# Altium PCB PCBoki.PcbDoc
Units mil, origin at the board's own origin, x right, y up, seen from the top; angles counter-clockwise.
Board outline 2430 x 3770 mil, 2 copper layers (Top Layer, Bottom Layer); 31 components, 31 nets, 145 pads, 13 vias.
Unrouted connection lines stored in the file: 5.
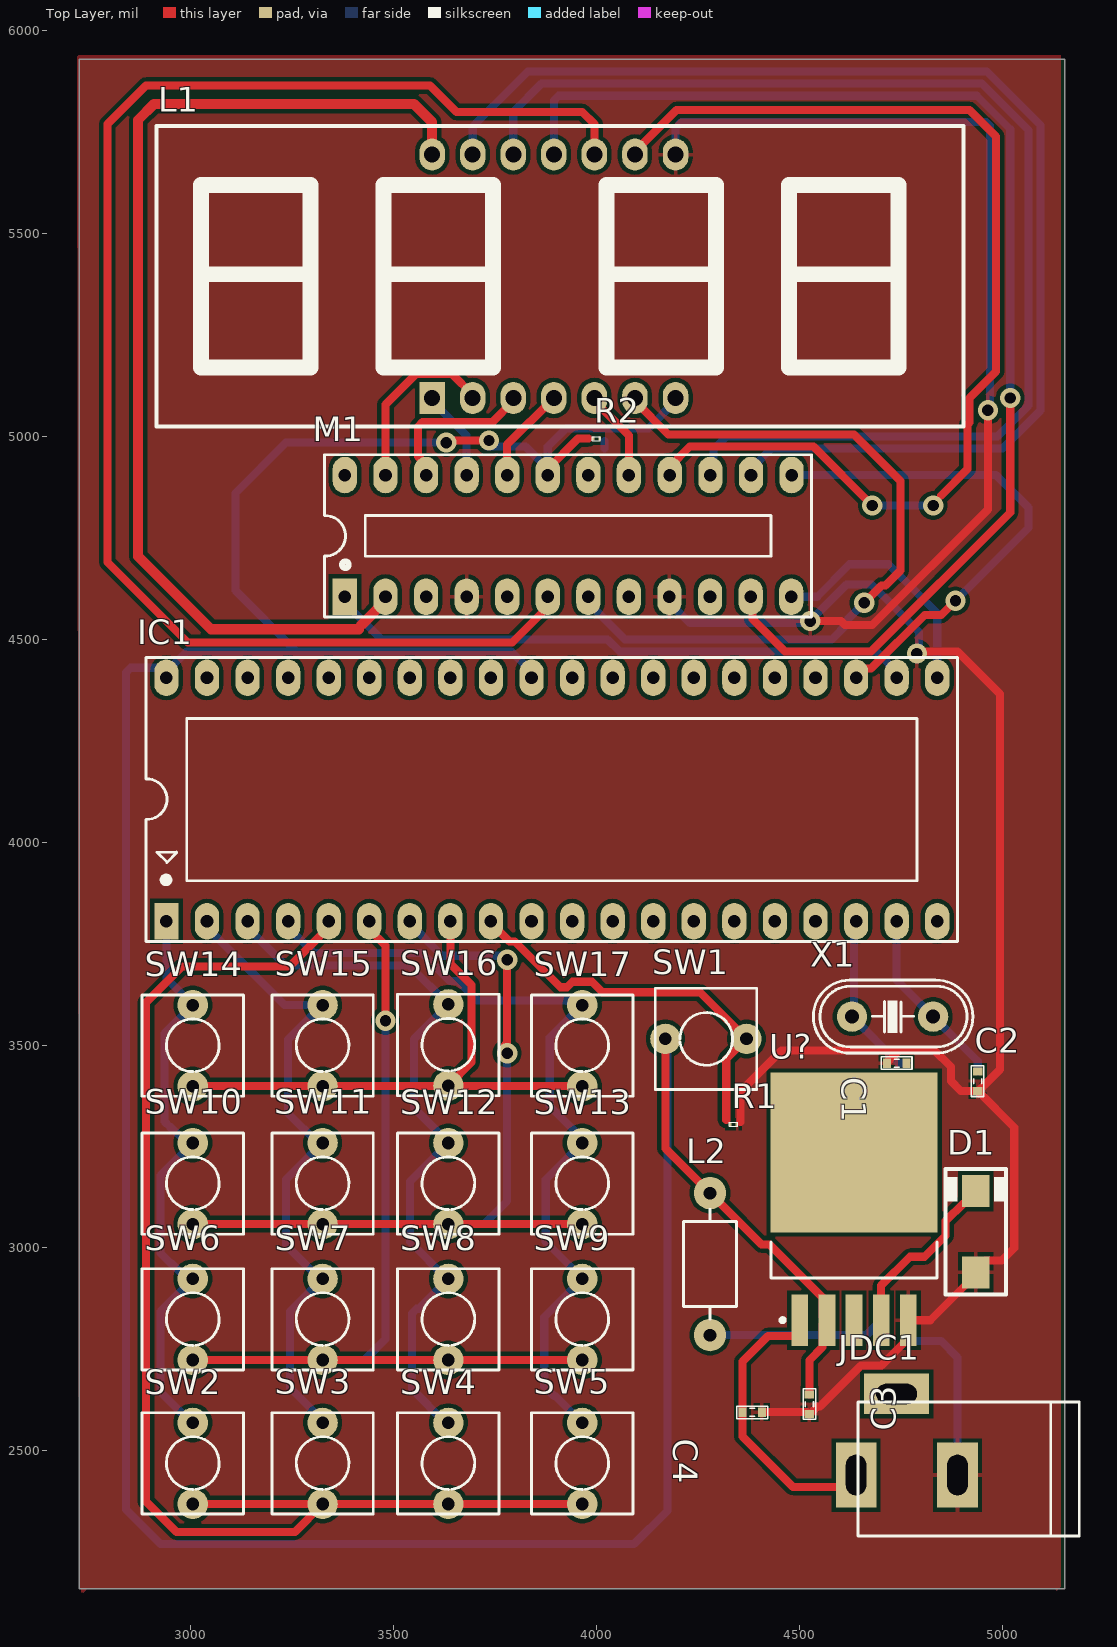
[diagram p0: Top Layer view]
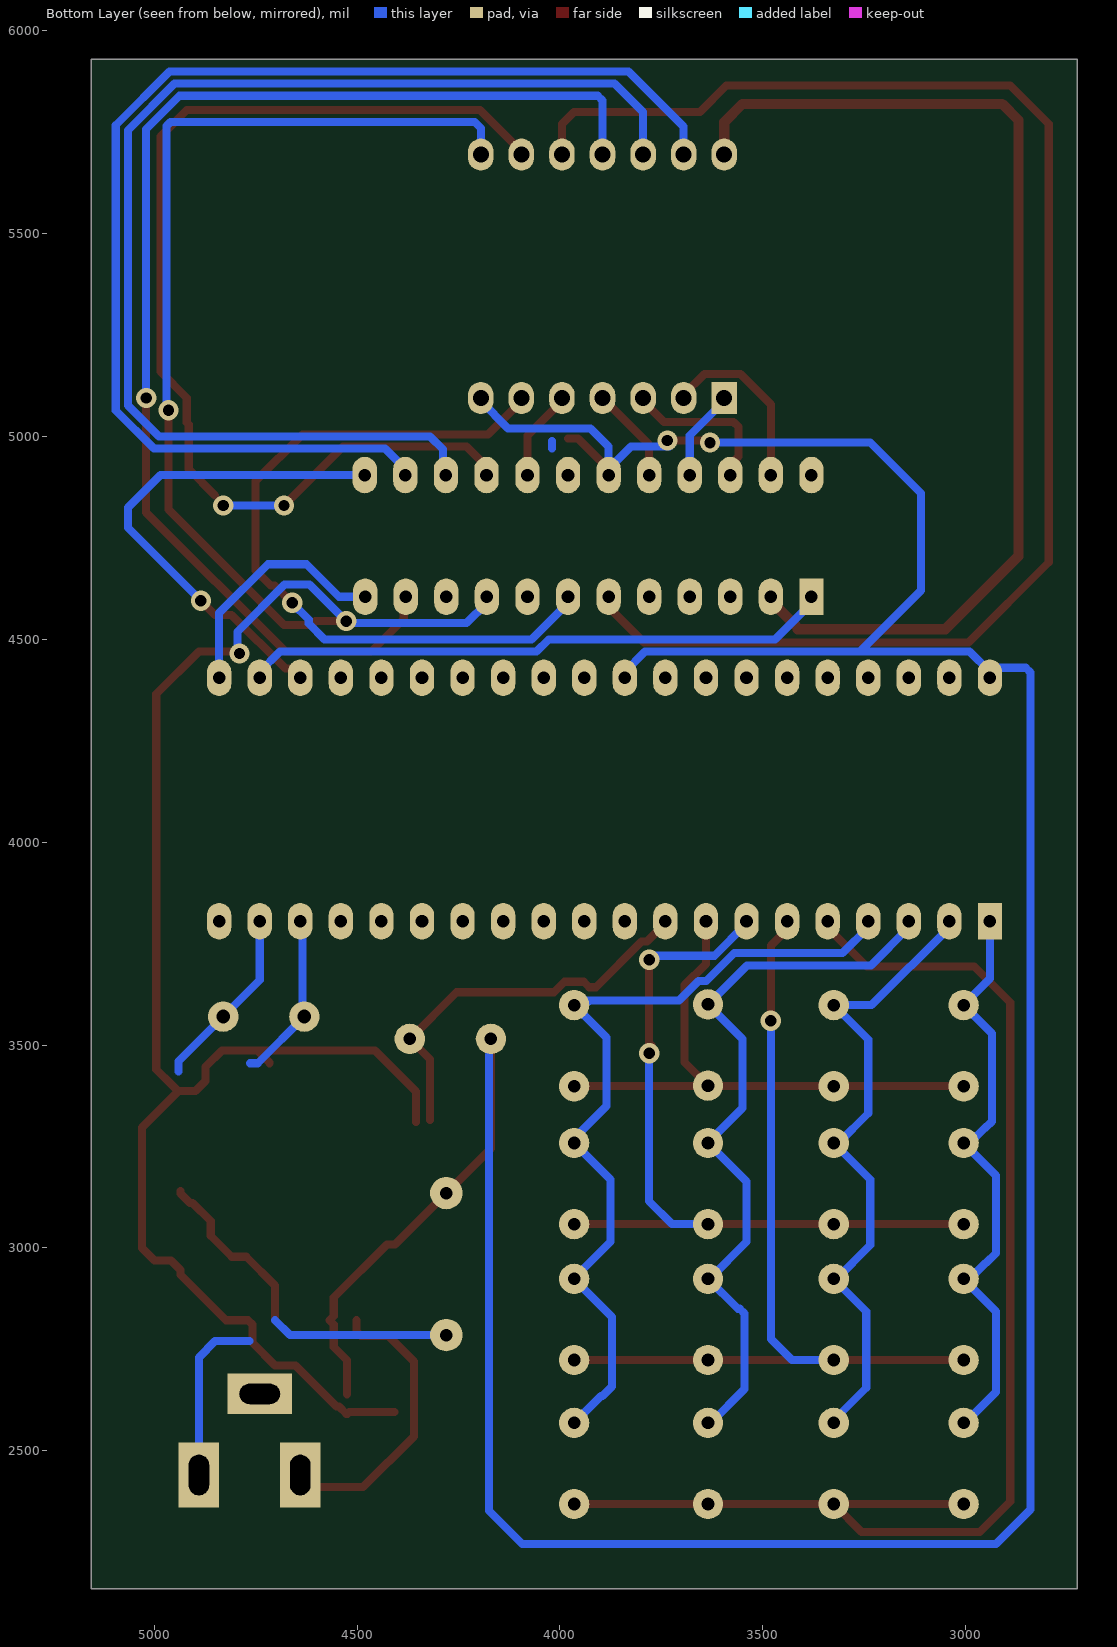
[diagram p1: Bottom Layer view, seen from below]

## Layer stack, top to bottom
Top Solder: solder mask 0.4, Solder Resist, Dk 3.5
Top Layer: signal copper 1.4
Dielectric 1: dielectric 12.6, FR-4, Dk 4.8
Bottom Layer: signal copper 1.4
Bottom Solder: solder mask 0.4, Solder Resist, Dk 3.5

## Board outline
2725,2160 5155,2160 5155,5930 2725,5930

## Design rules (kind name [scope] priority, off if disabled: settings)
Clearance [All] p1: gap=10 ignorepadtopadclearanceinfootprint=FALSE except(0: Arc-Hole Track-Hole SMDPad-Hole THPad-Hole Via-Hole Fill-Hole Poly-Hole Region-Hole Text-Hole)
PolygonConnect [All] p1: connectstyle=Relief reliefconductorwidth=10 reliefentries=4 polygonreliefangle="90 Angle" airgapwidth=10
RoutingVias [All] p1: holewidth=19.68 width=27.56 viastyle="Through Hole" minholewidth=15.75 minwidth=27.56 maxholewidth=19.68 maxwidth=27.56
SolderMaskExpansion [All] p1: expansion=4 istentingtop=FALSE
Width [All] p1: maxlimit=40 minlimit=20 preferedwidth=30 minimp=50.000000 maximp=50.000000 favimp=50.000000
30 further rules are at their usual default settings.

## Classes and differential pairs
component class 3: C3 C4 D1 JDC1 L2 U?
component class 2: SW2 SW3 SW4 SW5 SW6 SW7 SW8 SW9 SW10 SW11 SW12 SW13 SW14 SW15 SW16 SW17
component class 1: L1 M1 R2
component class 0: C1 C2 IC1 R1 SW1

## Components (designator, comment, footprint, x,y, rotation, side; value= is the part's Value field where it differs from the comment)
C1 "22p" CAP_0402 4740,3455 r0 top value=33p
C2 "22p" CAP_0402 4940,3411 r90 top value=33p
C3 "220uF" CAP_0402 4525,2615 r270 top value=33p
C4 "680 uF" CAP_0402 4384,2595 r180 top value=33p
D1 "1N5822" SMA 4935,3039.84 r90 top value="Diode c?m 1N5408"
IC1 "AT89C52" DIP40/W0.6 2940,3805 r0 top
JDC1 "Jac DC" DC-IN 4765,2540 r180 top
L1 "Led 7 Seg 4 digit - Anode" LED7SEG-4-0.56-RG 3915,5390 r0 top
L2 "33 uH" L/0.4 4280,2785 r90 top value="150 mH"
M1 "MAX7219ENG" DIP24/W0.3 3380,4605 r0 top
R1 "100k" RES-SMD-0101 4337.87,3305.01 r180 top
R2 "10k" RES-SMD-0101 4000,4995 r0 top
SW1 "SW" SW2 4370,3515 r180 top value="SW chip 2 pin"
SW2 "SW" SW2 3005,2568.5 r270 top value="SW chip 2 pin"
SW3 "SW" SW2 3325,2568.5 r270 top value="SW chip 2 pin"
SW4 "SW" SW2 3635,2568.5 r270 top value="SW chip 2 pin"
SW5 "SW" SW2 3965,2568.5 r270 top value="SW chip 2 pin"
SW6 "SW" SW2 3005,2923.5 r270 top value="SW chip 2 pin"
SW7 "SW" SW2 3325,2923.5 r270 top value="SW chip 2 pin"
SW8 "SW" SW2 3635,2923.5 r270 top value="SW chip 2 pin"
SW9 "SW" SW2 3965,2923.5 r270 top value="SW chip 2 pin"
SW10 "SW" SW2 3005,3258.5 r270 top value="SW chip 2 pin"
SW11 "SW" SW2 3325,3258.5 r270 top value="SW chip 2 pin"
SW12 "SW" SW2 3635,3258.5 r270 top value="SW chip 2 pin"
SW13 "SW" SW2 3965,3258.5 r270 top value="SW chip 2 pin"
SW14 "SW" SW2 3005,3598.5 r270 top value="SW chip 2 pin"
SW15 "SW" SW2 3325,3598.5 r270 top value="SW chip 2 pin"
SW16 "SW" SW2 3635,3600 r270 top value="SW chip 2 pin"
SW17 "SW" SW2 3965,3598.5 r270 top value="SW chip 2 pin"
U? "LM2976" TO-263 4635,3057.83 r90 top
X1 "4Mhz" XT2 4730,3570 r180 top

## Footprints (in the part's own frame and the unit in brackets; to place one, negate y for a bottom-side part, rotate by r counter-clockwise, add the part's x,y. Pads: shape width x height; smd on the part's side, far side on the other; paste and mask are expansions set on the pad)
CAP_0402 [mm]
  rect 0.5x0.6 smd: 1(-0.61,0) 2(0.61,0)
  silkscreen extent -0.97,-0.38 0.97,0.41, body extent -0.5,-0.27 0.5,0.26, height 0.35
DC-IN [mil] "Jac DC input"
  rect 100x160 hole 50 slot 100 at 90 deg: 1(125,100) 2(-125,100)
  rect 160x100 hole 50 slot 100 at 0 deg: 3(25,-100)
  silkscreen extent -425,-80 120,250, body extent -410,-105 134,269, height 434
DIP24/W0.3 [mil] "DIP24/W.300, Pin to pin 100mil"
  rect 60x90 hole 31: 1(0,0)
  oval 60x90 hole 31: 2(100,0) 3(200,0) 4(300,0) 5(400,0) 6(500,0) 7(600,0) 8(700,0) 9(800,0) 10(900,0) 11(1000,0) 12(1100,0) 13(1101,300) 14(1001,300) 15(901,300) 16(801,300) 17(700,300) 18(600,300) 19(500,300) 20(400,300) 21(300,300) 22(200,300) 23(100,300) 24(0,300)
  silkscreen extent -50,-50 1150,350, body extent -89,-3 1181,307, height 200
DIP40/W0.6 [mil] "40 PIN, W 600mil, Pin to pin 100mil"
  rect 60x90 hole 31: 1(0,0)
  oval 60x90 hole 31: 2(100,0) 3(200,0) 4(300,0) 5(400,0) 6(500,0) 7(600,0) 8(700,0) 9(800,0) 10(900,0) 11(1000,0) 12(1100,0) 13(1200,0) 14(1300,0) 15(1400,0) 16(1500,0) 17(1600,0) 18(1700,0) 19(1800,0) 20(1900,0) 21(1900,600) 22(1800,600) 23(1700,600) 24(1600,600) 25(1500,600) 26(1400,600) 27(1300,600) 28(1200,600) 29(1100,600) 30(1000,600) 31(900,600) 32(800,600) 33(700,600) 34(600,600) 35(500,600) 36(400,600) 37(300,600) 38(200,600) 39(100,600) 40(0,600)
  silkscreen extent -50,-50 1950,650, body extent -82,-10 1982,600, height 224
L/0.4 [mil] "Inductor , 2 Pin, L 350mil, W 150 mil"
  round 80 hole 31: 1(0,0) 2(350,0)
  silkscreen extent 40,-65 310,65
LED7SEG-4-0.56-RG [mil]
  round 60 on Top Overlay: 0(-535,-205) 0(-85,-205) 0(465,-205) 0(915,-205)
  round 118.11 on Top Overlay: 0(-20,-95) 0(-20,155)
  rect 62.99x78.74 hole 39.37: 1(-320,-295)
  oval 62.99x78.74 hole 39.37: 2(-220,-295) 3(-120,-295) 4(-20,-295) 5(80,-295) 6(180,-295) 7(280,-295) 8(280,305) 9(180,305) 10(80,305) 11(-20,305) 12(-120,305) 13(-220,305) 14(-320,305)
  silkscreen extent -1000,-365 990,375, body extent -995,-370 985,378, height 565
RES-SMD-0101 [mm]
  rect 0.15x0.25 smd: 1(-0.2,0) 2(0.2,0)
  silkscreen extent -0.25,-0.13 0.25,0.13, body extent -0.2,-0.1 0.2,0.1, height 0.12
SMA [mm]
  rect 2x1.7 smd: 1(-2.544,0) 2(2.544,0)
  silkscreen extent -3.94,-1.9 3.94,1.91, body extent -2.87,-1.4 2.87,1.4, height 2.29
SW2 [mil] "SW button 2pin, 250x 250 mil"
  round 75 hole 31: 1(0,0) 2(200,0)
  silkscreen extent -25,-125 225,125
TO-263 [mm]
  rect 3.2x1.05 smd: 1(-6,3.4) 2(-6,1.7) 3(-6,0) 4(-6,-1.7) 5(-6,-3.4)
  rect 10x10.45 smd: 6(4.5,0)
  silkscreen extent -6.12,-5.2 -1.1,5.2, body extent -6.58,-5.2 7.57,5.2, height 4.65
XT2 [mil] "Footpin for Crystal 2 pin"
  round 75 hole 34: 1(-100,0) 2(100,0)
  silkscreen extent -198,-90 195,90, body extent -233,-93 213,90, height 138

## Part data
C1 C2 C3 C4: library part CapSMD, "Capacitor", LatestRevisionDate=17-Jul-2002, LatestRevisionNote="Re-released for DXP Platform.", PackageReference=RAD-0.3, Published=8-Jun-2000, Publisher="Altium Limited"
D1: "Schottky Rectifiers"
IC1: "Atmel AT89C52, 8k Byte Flash Memory , 40 Pin"
JDC1: library part DCIN, "Jac DC input"
L1: library part LED7SEG-4-RG
L2: library part L1, "Inductor"
M1: "Serially Interfaced, 8-Digit LED Display Driver", Code_JEDEC=MS-001-AF, ComponentLink1Description="Manufacturer Link", ComponentLink1URL=http://www.maxim-ic.com/, ComponentLink2Description=Datasheet, ComponentLink2URL=http://pdfserv.maxim-ic.com/en/ds/MAX7219-MAX7221.pdf, DatasheetVersion=Jul-1997, LatestRevisionDate=29-May-2009, LatestRevisionNote="Component Body Added.", PackageDescription="DIP, 24-Pin, Row Spacing 7.62 mm, Pitch 2.54 mm", PackageReference=NG24A, PackageVersion=1997, Published=16-Jan-2001, Publisher="Altium Limited"
R1 R2: library part "Resistor - SMD", "Resistor", Manufacturer="Generic Components", Class=Passive, Published=08/06/2000, Publisher="Altium Hobart Technology Centre"
SW1 SW2 SW3 SW4 SW5 SW6 SW7 SW8 SW9 SW10 SW11 SW12 SW13 SW14 SW15 SW16 SW17: library part SW2, "Switch button 2 pin"
U?: library part LM2596, Max Input Voltage="12 V", Max Output Current="3 (6.0 peak) A", Max Output Voltage=mV, Temperature Range="-40 to +125 degC", Category=IC-Power, Min Input Voltage=mV, Min Output Voltage=mV, Mounting Technology="Surface Mount", Status=Unreleased, Supply Voltage=mV
X1: library part XT2, "Crystal For all Crystal 2pin."

## Via types
v1: diameter 50, hole 28, Top Layer to Bottom Layer, 13 vias

## Nets (pads, with @x,y where several pads share a name; then routed paths per layer and width w, separated by ;. In a path a pad name is that pad's centre, name@x,y a point inside that pad or via, vN(x,y) a via of type N, cw(c..) or ccw(c..) an arc to the next point about the centre after c; other vN are vias at no path point)
00: L1.14 M1.2 | length 2636.2
  Top Layer w10: 3414.14,4525 3420,4530.86 3420,4535 ; M1.2@3480,4595 M1.2
  Top Layer w25: 3414.14,4525 3050,4525 2870,4705 2870,5780 2910,5820 3550,5820 3595,5775 L1.14@3595,5700 ; 3420,4535 M1.2@3480,4595
01: L1.11 M1.11 | length 3109
  Top Layer w20: M1.11 4384.93,4600.07 4384.93,4550.07 4465,4470 4676.86,4470 5020,4813.14 v1(5020,5095)
  Bottom Layer w20: L1.11 3895,5828.28 3906.72,5840 4937.43,5840 5020,5757.43 v1(5020,5095)
02: L1.10 M1.6 | length 3661.8
  Top Layer w20: M1.6 3880,4580 3792.5,4492.5 2992.5,4492.5 2795,4690 2795,5770 2890,5865 3590,5865 3655,5800 3965,5800 3995,5770 L1.10
03: L1.6 M1.7 | length 1863.1
  Top Layer w20: L1.6 4095,5087.13 4177.13,5005 4635,5005 4750,4890 4750,4670 4712.87,4632.87 4702.87,4632.87 v1(4660,4590)
  Bottom Layer w20: M1.7 3980,4590 4070,4500 4580,4500 4619.04,4539.04 4619.04,4549.04 v1(4660,4590)
+5: C3.1 IC1.31 IC1.40 L1.7 L2.2 M1.19 R2.1 SW1.2 U?.2 | length 8616.9
  Top Layer w20: v1@3635,4990 v1(3735,4990) ; M1.19 3880,4920 3955,4995 3980,4995 ; SW1.2 4170,3245 L2.2 4406.8,3008.2 4426.5,3008.2 4557.4,2877.3 4557.4,2832.28 U?.2 4557.4,2810.94 4557.4,2755.21 4525,2722.81 C3.1
  Bottom Layer w20: IC1.40 2940,4409.18 2921.52,4427.65 2917.35,4427.65 2915,4430 2851.72,4430 2840,4418.28 2840,2355 2925,2270 4092.96,2270 4175,2352.04 4175,3475 ; IC1.40@2940,4420 2990,4470 3260,4470 ; v1(3630,4985) 3235,4985 3110,4860 3110,4620 3260,4470 ; v1@3730,4975 3825,4975 M1.19@3880,4920 ; IC1.31 3840,4420 3790,4470 3260,4470 ; M1.19 M1.19@3880,4920 ; L1.7 4195,5087.13 4127.87,5020 3925,5020 3880,4975 M1.19@3880,4920
GND: C1.1 C2.1 C3.2 C4.1 D1.1 JDC1.2 L1.8 M1.4 M1.9 R1.1 U?.5 | length 6877.2
  Top Layer w20: 4355,3310 4355,3385.84 4455.97,3486.81 4745.87,3486.81 ; C4.1 4519.35,2595 4523.35,2591 C3.2 4526.65,2591 4544.81,2609.16 4550.87,2609.16 4651.72,2710 4702.26,2710 4758.19,2765.93 4758.19,2810.94 U?.5 4822.83,2821.61 4935,2933.78 D1.1 4935,2945.59 4958.46,2969.06 4999.06,2969.06 5030,3000 5030,3297 4941.81,3385.19 4941.81,3386.84 C2.1@4941.65,3387 ; v1(4526.9,4545) 4602.51,4545 4612.51,4535 4680,4535 4965,4820 v1(4965,5065) ; C1.1 4716,3456.65 4734.16,3474.81 4734.16,3475.1 4745.87,3486.81 ; v1(4790,4465) 4795,4470 4890,4470 4995,4365 4995,3440.06 4957.67,3402.73 4957.38,3402.73 C2.1@4941.65,3387 ; 4745.87,3486.81 4833.19,3486.81 4873.59,3446.41 4873.59,3411.6 4898.19,3387 C2.1 C2.1@4941.65,3387
  Bottom Layer w20: M1.9 4180,4590 4230,4540 4521.9,4540 v1(4526.9,4545) 4616.9,4635 4678.64,4635 4795,4518.64 v1@4795,4480 ; L1.8 4195,5760 4210,5775 4960,5775 4970,5765 4970,5070 v1(4965,5065) ; 4765,2770 4850,2770 4890,2730 JDC1.2
NetC1_2: C1.2 IC1.18 X1.2 | length 420.8
  Bottom Layer w20: IC1.18 4635,3800 4635,3575 X1.2 4745,3455 4764,3455
NetC2_2: C2.2 IC1.19 X1.1 | length 452.8
  Bottom Layer w20: IC1.19 4740,3660 X1.1 4940,3460 4940,3435
NetC4_2: C4.2 JDC1.1 U?.1 | length 729
  Top Layer w20: U?.1 4501.14,2793.33 4490.47,2782.66 4422.66,2782.66 4360,2720 C4.2 4360,2535 4485,2410 4610,2410 JDC1.1
NetD1_2: D1.2 L2.1 U?.4 | length 876.5
  Top Layer w20: U?.4 4701.93,2906.93 4773.17,2978.17 4809.02,2978.17 4860.71,3029.87 4860.71,3065.71 4905.63,3110.63 4911.54,3110.63 4935,3134.09 D1.2
  Bottom Layer w20: L2.1 4665.31,2785 4701.93,2821.61
NetIC1_1: IC1.1 SW2.1 SW6.1 SW10.1 SW14.1 | length 1475.7
  Bottom Layer w20: IC1.1 2940,3663.5 SW14.1 2935,3528.5 2935,3311.72 2949.41,3297.31 2951.31,3297.31 2990.12,3258.5 SW10.1 2925,3178.5 2925,2986.72 2949.41,2962.31 2951.31,2962.31 2990.12,2923.5 SW6.1 2925,2843.5 2925,2645 3001.5,2568.5 SW2.1
NetIC1_2: IC1.2 SW3.1 SW7.1 SW11.1 SW15.1 | length 1638.5
  Bottom Layer w20: IC1.2@3035,3810 IC1.2 3040,3790 3231.5,3598.5 SW15.1 3240,3513.5 3240,3331.72 3313.22,3258.5 SW11.1 3235,3168.5 3235,3006.72 3318.22,2923.5 SW7.1 3245,2843.5 3245,2655 3325,2575 SW3.1
NetIC1_3: IC1.3 SW4.1 SW8.1 SW12.1 SW16.1 | length 1852.7
  Bottom Layer w20: IC1.3 3140,3790 3233.57,3696.43 3538.57,3696.43 SW16.1 3550,3515 3550,3345 3635,3260 SW12.1 3540,3163.5 3540,3015 3631.5,2923.5 SW8.1 3561.5,2850 3556.72,2850 3545,2838.28 3545,2651.72 3628.22,2568.5 SW4.1
NetIC1_4: IC1.4 SW5.1 SW9.1 SW13.1 SW17.1 | length 2069.7
  Bottom Layer w20: IC1.4 3240,3790 3303.57,3726.43 3570.32,3726.43 3639.25,3657.5 3658.82,3657.5 3706.32,3610 3925.78,3610 3926.76,3609.02 3954.48,3609.02 SW17.1 3885,3518.5 3885,3350 3965,3270 SW13.1 3875,3168.5 3875,3015 3965,2925 SW9.1 3871.5,2830 3871.5,2658.5 3895,2635 3898.5,2635 SW5.1
NetIC1_5: IC1.5 SW2.2 SW3.2 SW4.2 SW5.2 | length 3236.1
  Top Layer w20: SW2.2 SW3.2 ; IC1.5@3330,3805 IC1.5 3340,3790 3243.67,3693.67 2978.67,3693.67 2890,3605 2890,2375 2965,2300 3256.5,2300 SW3.2 ; SW5.2 SW4.2 SW3.2
NetIC1_6: IC1.6 SW6.2 SW7.2 SW8.2 SW9.2 | length 2178.1
  Top Layer w20: SW6.2 SW7.2 SW8.2 SW9.2 ; IC1.6@3440,3815 IC1.6 3440,3785.15 3480,3745.15 v1@3480,3575
  Bottom Layer w20: SW7.2 3392.5,2723.5 3392.72,2723.28 3428.28,2723.28 3480,2775 v1(3480,3560)
NetIC1_7: IC1.7 SW10.2 SW11.2 SW12.2 SW13.2 | length 1979.1
  Top Layer w20: SW10.2 SW11.2 SW12.2 SW13.2 ; v1@3775,3500 3780,3505 v1(3780,3710)
  Bottom Layer w20: IC1.7 3540,3799.18 3619.18,3720 v1@3775,3720 ; SW12.2 3723.5,3058.5 3780,3115 v1(3780,3480)
NetIC1_8: IC1.8 SW14.2 SW15.2 SW16.2 SW17.2 | length 1411.8
  Top Layer w20: SW14.2 SW15.2 3325.75,3399.25 3634.25,3399.25 SW16.2 ; IC1.8 3640,3700.1 3692.5,3647.6 3692.5,3457.5 SW16.2 ; SW17.2 3964.25,3399.25 3635.75,3399.25 SW16.2
NetIC1_9: IC1.9 R1.2 SW1.1 | length 984.5
  Top Layer w20: IC1.9 3740,3800.82 3785.82,3755 3798.64,3755 3911.13,3642.51 3927.7,3642.51 3941.18,3656 3988.82,3656 4014.82,3630 4255,3630 SW1.1 4320,3465 4320,3315
NetIC1_21: IC1.21 M1.12 | length 602.8
  Bottom Layer w20: M1.12 4544.24,4605 4624.24,4685 4720,4685 4840,4565 IC1.21
NetIC1_22: IC1.22 M1.1 | length 1460.4
  Bottom Layer w20: M1.1 3380,4590 3470,4500 4027.57,4500 4057.57,4470 4690,4470 4740,4420 IC1.22
NetIC1_23: IC1.23 M1.13 | length 1233.7
  Top Layer w20: IC1.23 4640,4409.18 4658.48,4427.65 4676.94,4427.65 4809.29,4560 4850,4560 v1(4885,4595)
  Bottom Layer w20: M1.13 4985,4905 5065,4825 5065,4775 v1@4895,4605
NetL1_1: L1.1 M1.21 | length 225.2
  Bottom Layer w20: L1.1 3595,5087.13 3680,5002.13 M1.21
NetL1_2: L1.2 M1.23 | length 449.5
  Top Layer w20: M1.23 3480,5079.15 3555.22,5154.37 3643.5,5154.37 3695,5102.87 L1.2
NetL1_3: L1.3 M1.22 | length 396.3
  Top Layer w20: M1.22 3580,4930.82 3560,4950.82 3560,5023.91 3571.72,5035.63 3743.5,5035.63 3795,5087.13 L1.3
NetL1_4: L1.4 M1.20 | length 237.6
  Top Layer w20: M1.20 3780,4980 L1.4
NetL1_5: L1.5 M1.17 | length 233.1
  Top Layer w20: L1.5 3995,5087.13 4080,5002.13 M1.17
  Bottom Layer w20: L1.5@3995,5087.13 L1.5
NetL1_9: L1.9 M1.16 | length 2672.5
  Top Layer w20: L1.9 4095,5702.87 4197.13,5805 4920,5805 4985,5740 4985,5160 4920,5095 4920,5035 4915,5030 4915,4920 4850,4855 ; M1.16 4181,4926 4230,4975 4535,4975 v1(4680,4830)
  Bottom Layer w20: v1@4670,4840 v1(4680,4830) v1(4830,4830)
NetL1_12: L1.12 M1.15 | length 3018
  Bottom Layer w20: L1.12 3795,5800 3865,5870 4949.85,5870 5065,5754.85 5065,5076.36 4988.64,5000 4320,5000 4288.65,4968.65 4288.65,4912.65 M1.15
NetL1_13: L1.13 M1.14 | length 3072.5
  Bottom Layer w20: L1.13 3695,5764.37 3830.63,5900 4962.28,5900 5095,5767.28 5095,5063.93 5001.07,4970 4431,4970 4381,4920 M1.14
NetM1_18: M1.18 R2.2 | length 69.7
  Top Layer w20: M1.18 M1.18@3980,4930.82
  Bottom Layer w20: M1.18 M1.18@3980,4930.82 ; 4020,4970.82 4020,4988.9
pads on no net: IC1.10 IC1.11 IC1.12 IC1.13 IC1.14 IC1.15 IC1.16 IC1.17 IC1.20 IC1.24 IC1.25 IC1.26 IC1.27 IC1.28 IC1.29 IC1.30 IC1.32 IC1.33 IC1.34 IC1.35 IC1.36 IC1.37 IC1.38 IC1.39 JDC1.3 L1.0 M1.3 M1.5 M1.8 M1.10 M1.24 U?.3 U?.6

## Polygon pours and split planes (outlines as drawn)
GND on Top Layer "GND_L01_P001" (solid, pour order 1): 2723.54,5940 5140,5940 5140,2160 2745,2160 2730,2145
GND on Top Layer "GND_L01_P000" (solid, pour order 0): 2720,5940 5145,5940 5145,2165 5135,2155 5130,2160 2725,2160